# Altium PCB PCB1.PcbDoc
Units mil, origin at the board's own origin, x right, y up, seen from the top; angles counter-clockwise.
Board outline 3430 x 2210 mil, 2 copper layers (Top Layer, Bottom Layer); 43 components, 48 nets, 175 pads, 18 vias.
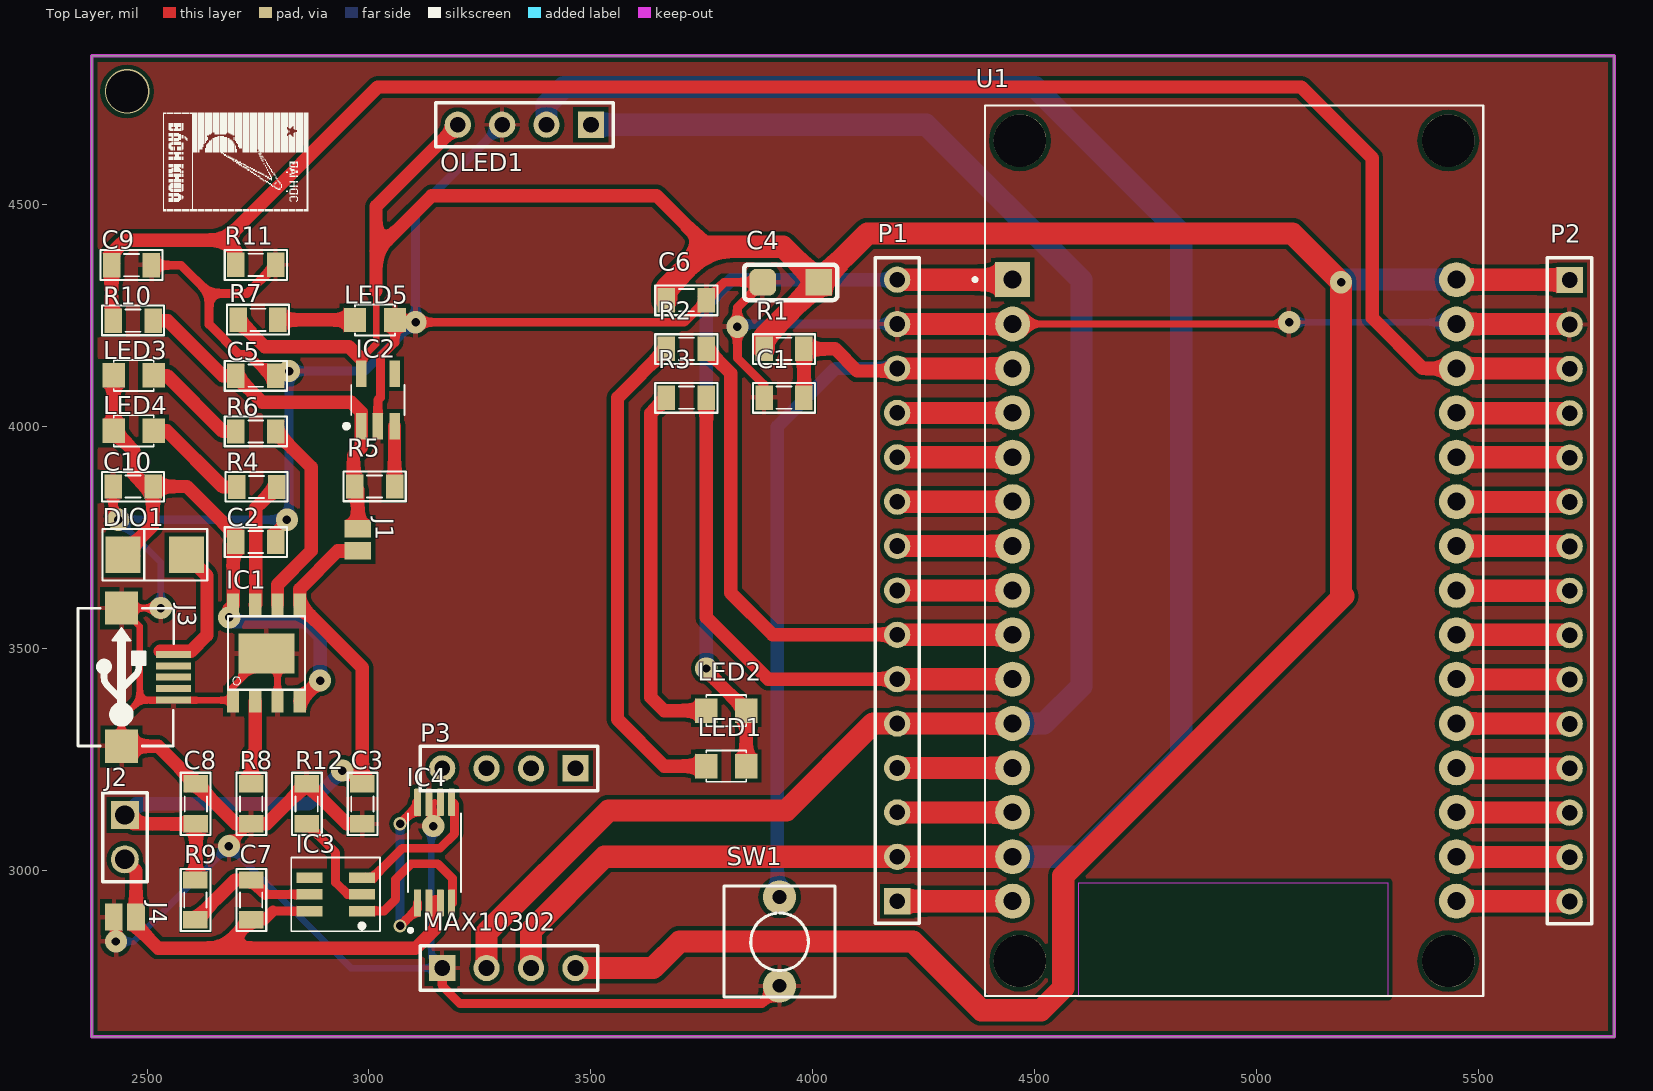
[diagram p0: Top Layer view]
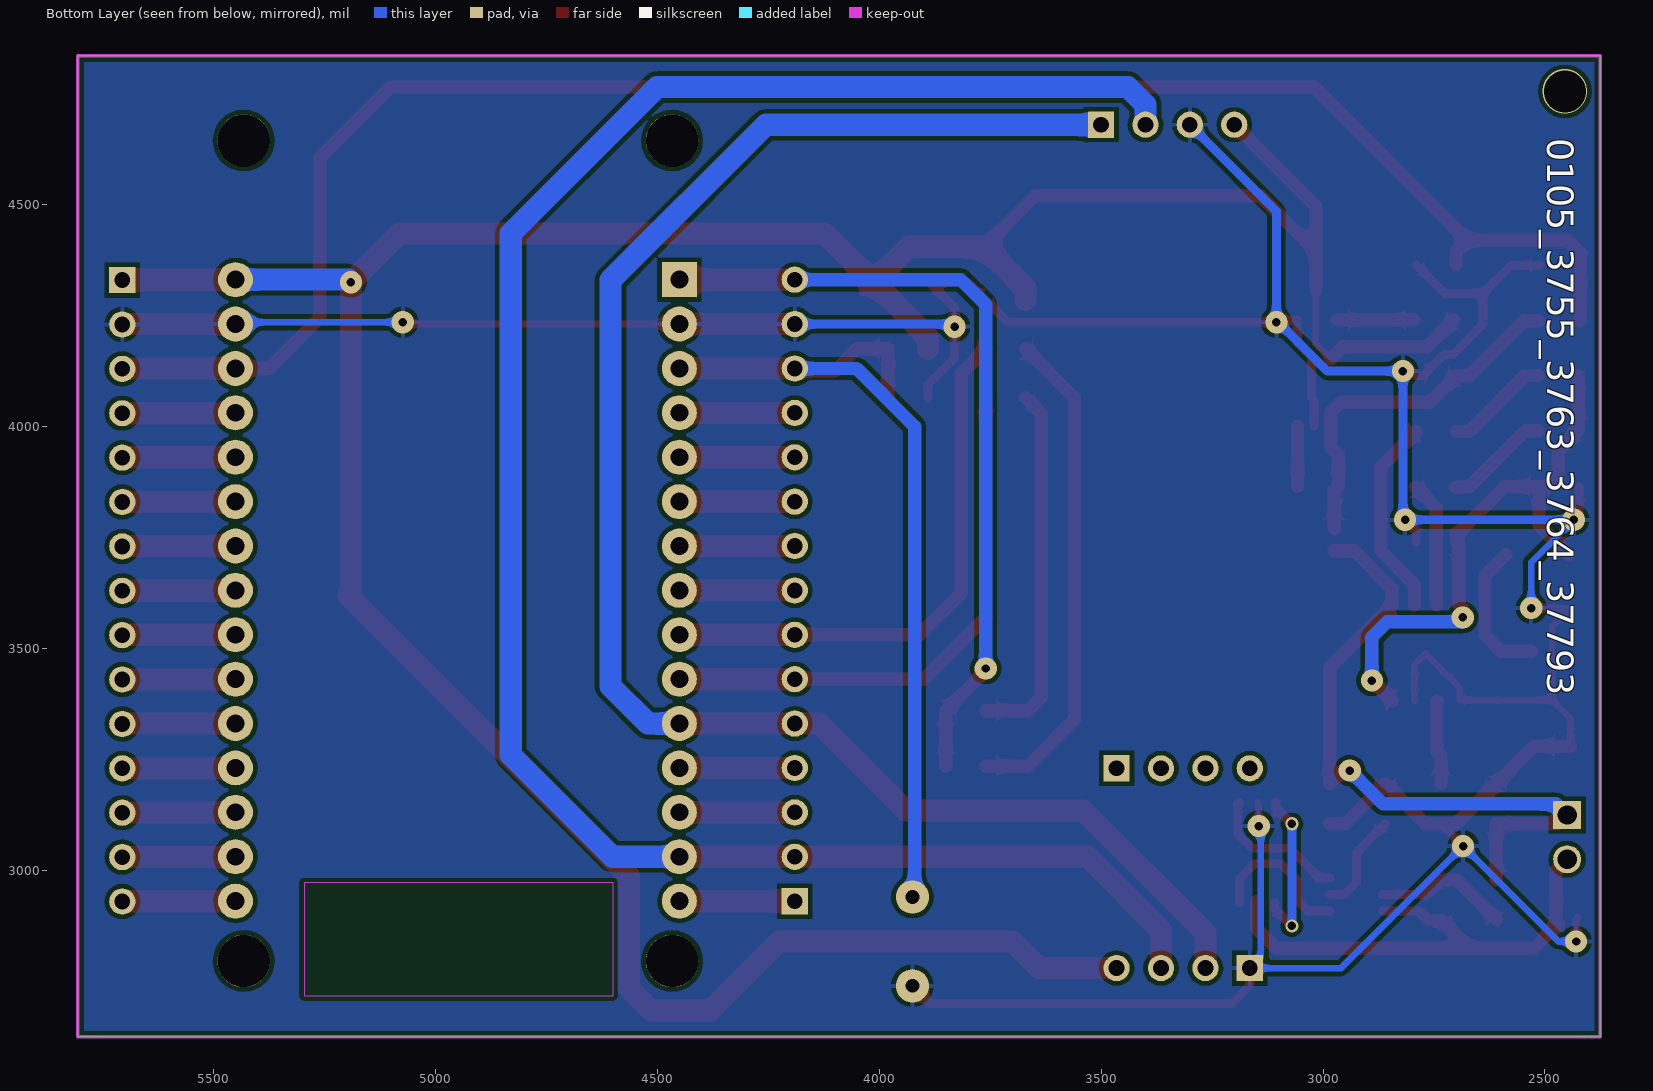
[diagram p1: Bottom Layer view, seen from below]
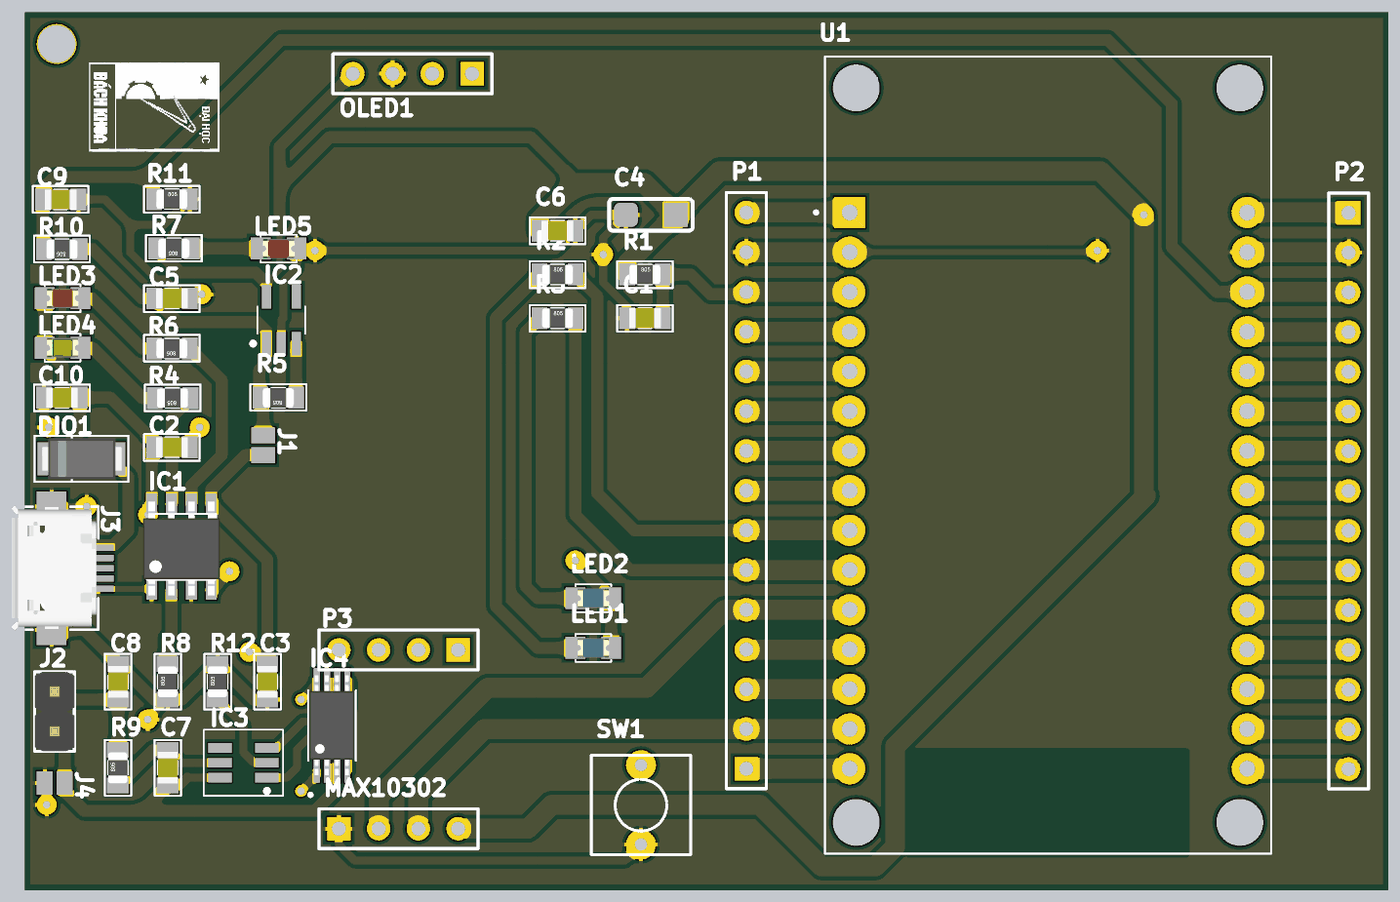
[diagram p2: 3D render of the assembled board from above, using the file's embedded part models]

## Layer stack, top to bottom
Top Solder: solder mask 0.4, Solder Resist, Dk 3.5
Top Layer: signal copper 1.4
Dielectric 1: dielectric 12.6, FR-4, Dk 4.8
Bottom Layer: signal copper 1.4
Bottom Solder: solder mask 0.4, Solder Resist, Dk 3.5

## Board outline
2375,2625 2375,4835 5805,4835 5805,2625

## Design rules (kind name [scope] priority, off if disabled: settings)
Clearance [All] p1: gap=10 ignorepadtopadclearanceinfootprint=FALSE except(0: Arc-Hole Track-Hole SMDPad-Hole THPad-Hole Via-Hole Fill-Hole Poly-Hole Region-Hole Text-Hole)
DiffPairsRouting [All] p1: maxlimit=10 minlimit=10 mostfreqgap=10 toplayer_minwidth=10 toplayer_maxwidth=10 toplayer_prefwidth=10 bottomlayer_minwidth=10 bottomlayer_maxwidth=10 bottomlayer_prefwidth=10 maxuncoupledlength=500
HoleSize [All] p1: absolutevalues=TRUE maxlimit=100 minlimit=15 maxpercent=80.000 minpercent=20.000
PolygonConnect [All] p1: connectstyle=Relief reliefconductorwidth=10 reliefentries=4 polygonreliefangle="90 Angle" airgapwidth=10
RoutingVias [All] p1: holewidth=19 width=50 viastyle="Through Hole" minholewidth=19 minwidth=50 maxholewidth=19 maxwidth=50
SolderMaskExpansion [All] p1: expansion=4
Width [All] p1: maxlimit=50 minlimit=15 preferedwidth=30
28 further rules are at their usual default settings.

## Classes and differential pairs
component class U_Power: C2 C3 C4 C5 C6 C7 C8 C9 C10 C? DIO1 IC1 IC2 IC3 IC4 IC? J1 J2 J3 J4 J? LED3 LED4 LED5 LED? R4 R5 R6 R7 R8 R9 R10 R11 R12 R?
component class U_MCU: C1 LED1 LED2 MAX10302 OLED1 P1 P2 P3 R1 R2 R3 SW1 U1

## Components (designator, comment, footprint, x,y, rotation, side; value= is the part's Value field where it differs from the comment)
C1 "10uF" CAP_0805 3935,4065 r0 top value=33p
C2 "100nF" CAP_0805 2745,3740 r0 top value=33p
C3 "100nF" CAP_0805 2985,3150 r90 top value=33p
C4 "220uF" CAP_TANTALUM_3216 3950,4325 r180 top
C5 "470nF" CAP_0805 2745,4114.7 r0 top value=33p
C6 "100nF" CAP_0805 3715,4285 r0 top value=33p
C7 "100nF" CAP_0805 2734.33,2933.5 r90 top value=33p
C8 "100nF" CAP_0805 2610,3150 r270 top value=33p
C9 "100nF" CAP_0805 2465,4363.5 r180 top value=33p
C10 "10uF" CAP_0805 2468.5,3864.9 r0 top value=33p
DIO1 "Diode SMD" DIO-214AC(SMA) 2514.5,3713 r0 top value=1N5007
IC1 "TP4056" TP4056 2768.96,3490 r90 top
IC2 "RT9013" SOT23-5 3020.21,4060 r90 top
IC3 "DW01A" SOT23-6 2925,2945.94 r180 top
IC4 "FS8205A" FS8205A 3150,3040 r90 top
J1 "Jumper2" JUMPER2 2975,3770 r90 top
J2 "VBAT_IN" JP2-D1T 2449.94,3125 r270 top
J3 "USB-5" USB-M1 2559.29,3435.51 r90 top
J4 "Jumper2" JUMPER2 2425,2895 r180 top
LED1 "LED" LED-0805-Blue 3850,3235 r180 top value="LED 3 ly Single Colour"
LED2 "LED" LED-0805-Blue 3850,3360 r180 top value="LED 3 ly Single Colour"
LED3 "LED" LED-0805-Red 2425,4115.2 r0 top value="LED 3 ly Single Colour"
LED4 "LED" LED-0805-Green 2425,3990.3 r0 top value="LED 3 ly Single Colour"
LED5 "" LED-0805-Red 2968.5,4240 r0 top value="LED 3 ly Single Colour"
MAX10302 "Header 4" HDR1X4 3165,2780 r0 top
OLED1 "LCD" HDR1X4 3500,4680 r180 top
P1 "Header 15" HDR1X15 4190,2930.83 r90 top
P2 "Header 15" HDR1X15 5705,4330 r270 top
P3 "Header 4" HDR1X4 3465,3230 r180 top
R1 "10k" RES-SMD-0805 3935,4175 r0 top
R2 "1k" RES-SMD-0805 3715,4175 r0 top
R3 "1k" RES-SMD-0805 3715,4065 r0 top
R4 "1k" RES-SMD-0805 2746.75,3863.9 r180 top
R5 "10k" RES-SMD-0805 3012.61,3864.9 r180 top
R6 "1k" RES-SMD-0805 2745,3988.8 r180 top
R7 "1k" RES-SMD-0805 2750,4240.5 r180 top
R8 "1k2" RES-SMD-0805 2734.33,3150 r90 top
R9 "0.1k" RES-SMD-0805 2609,2933.5 r90 top
R10 "10k" RES-SMD-0805 2468.5,4238.6 r180 top
R11 "100k" RES-SMD-0805 2745,4364.5 r0 top
R12 "1k" RES-SMD-0805 2859.67,3150 r90 top
SW1 "SW" SW2 3925,2740 r90 top value="SW chip 2 pin"
U1 "ESP32-DEVKIT-V1" MODULE_ESP32_DEVKIT_V1 4950,3720.16 r0 top

## Footprints (in the part's own frame and the unit in brackets; to place one, negate y for a bottom-side part, rotate by r counter-clockwise, add the part's x,y. Pads: shape width x height; smd on the part's side, far side on the other; paste and mask are expansions set on the pad)
CAP_0805 [mil]
  rect 39.37x55 smd: 1(-45,0) 2(45,0)
  silkscreen extent -70,-34 70,33, body extent -40,-25 40,25, height 24
CAP_TANTALUM_3216 [mil]
  rect 60x60 smd: 1(-62.99,0)
  rrect50% 60x60 smd: 2(62.99,0)
  silkscreen extent -105,-40 105,40, body extent -67,-35 67,35, height 67
DIO-214AC(SMA) [mm] "DO-214AC Diode Smallest Size"
  rect 2x2.1 smd: 1(1.88,-0.051) 2(-1.732,-0.051)
  silkscreen extent -2.92,-1.52 3.07,1.42, body extent -2.5,-1.35 2.7,1.25, height 2.4
FS8205A [mm]
  rrect25% 1.56x0.4 smd: 1(-2.88,1.031) 2(-2.88,0.381) 3(-2.88,-0.269) 4(-2.88,-0.919) 5(2.88,-0.919) 6(2.88,-0.269) 7(2.88,0.381) 8(2.88,1.031)
  silkscreen extent -4.54,-1.46 2.25,1.57, body extent -3.2,-1.4 3.2,1.53, height 1.2
HDR1X4 [mm] "Connector; Header; 4 Position"
  rect 1.5x1.5 hole 0.9: 1(0,0)
  round 1.5 hole 0.9: 2(2.54,0) 3(5.08,0) 4(7.62,0)
  silkscreen extent -1.27,-1.27 8.89,1.27, body extent -1.27,-1.27 8.89,1.27, height 7
HDR1X15 [mm] "Connector; Header; 15 Position"
  rect 1.5x1.5 hole 0.9: 1(0,0)
  round 1.5 hole 0.9: 2(2.54,0) 3(5.08,0) 4(7.62,0) 5(10.16,0) 6(12.7,0) 7(15.24,0) 8(17.78,0) 9(20.32,0) 10(22.86,0) 11(25.4,0) 12(27.94,0) 13(30.48,0) 14(33.02,0) 15(35.56,0)
  silkscreen extent -1.27,-1.27 36.83,1.27, body extent -1.27,-1.27 36.83,1.27, height 7
JP2-D1T [mm] "2 pins, 1 row, straight, gold plating"
  rect 1.6x1.6 hole 1.1: 1(0,0)
  round 1.6 hole 1.1: 2(2.54,0)
  silkscreen extent -1.27,-1.27 3.81,1.27, body extent -1.27,-1.27 3.81,1.27, height 8.54
JUMPER2 [mil]
  rect 40x60 smd: 1(-50,0) 2(0,0)
LED-0805-Blue [mil]
  rect 50x55 smd: 1(0,0) 2(90,0)
  silkscreen extent 0,-35 90,35, body extent 5,-25 85,25, height 43
LED-0805-Green [mil]
  rect 50x55 smd: 1(0,0) 2(90,0)
  silkscreen extent 0,-35 90,35, body extent 5,-25 85,25, height 43
LED-0805-Red [mil]
  rect 50x55 smd: 1(0,0) 2(90,0)
  silkscreen extent 0,-35 90,35, body extent 5,-25 85,25, height 43
MODULE_ESP32_DEVKIT_V1 [mm]
  rect 2x2 / inner round 2 / far side rect 2x2 hole 1.02: 1(-12.7,15.515)
  round 2 hole 1.02: 2(-12.7,12.975) 3(-12.7,10.435) 4(-12.7,7.895) 5(-12.7,5.355) 6(-12.7,2.815) 7(-12.7,0.275) 8(-12.7,-2.265) 9(-12.7,-4.805) 10(-12.7,-7.345) 11(-12.7,-9.885) 12(-12.7,-12.425) 13(-12.7,-14.965) 14(-12.7,-17.505) 15(-12.7,-20.045) 16(12.7,-20.045) 17(12.7,-17.505) 18(12.7,-14.965) 19(12.7,-12.425) 20(12.7,-9.885) 21(12.7,-7.345) 22(12.7,-4.805) 23(12.7,-2.265) 24(12.7,0.275) 25(12.7,2.815) 26(12.7,5.355) 27(12.7,7.895) 28(12.7,10.435) 29(12.7,12.975) 30(12.7,15.515)
  round 3 hole 3 unplated: ""(-12.28,-23.475) ""(-12.28,23.475) ""(12.23,-23.475) ""(12.23,23.475)
  Keep-Out Layer region: 8.78,-25.475 -8.91,-25.475 -8.91,-18.985 8.78,-18.985
  Keep-Out Layer region: 8.78,-25.475 -8.91,-25.475 -8.91,-18.985 8.78,-18.985
  silkscreen extent -14.95,-25.48 14.23,25.48
RES-SMD-0805 [mil]
  rect 39.37x55 smd: 1(-45,0) 2(45,0)
  silkscreen extent -70,-34 70,33, body extent -39,-25 39,25, height 31
SOT23-5 [mm] "SOT23, 5-Leads, Body 3.0x3.0mm (max), Pitch 0.95mm, IPC Medium Density"
  rect 1.5x0.6 smd: 1(-1.5,0.95) 2(-1.5,0) 3(-1.5,-0.95) 4(1.5,-0.95) 5(1.5,0.95)
  silkscreen extent -1.62,-1.52 0.87,1.92, body extent -1.75,-1.52 1.75,1.53, height 1.45
SOT23-6 [mm] "SOT23, 5-Leads, Body 3.0x3.0mm (max), Pitch 0.95mm, IPC Medium Density"
  rect 1.5x0.6 smd: 1(-1.5,0.95) 2(-1.5,0) 3(-1.5,-0.95) 4(1.5,-0.95) 5(1.5,0) 6(1.5,0.95)
  silkscreen extent -2.54,-2.11 2.54,2.11, body extent -1.75,-1.52 1.75,1.53, height 1.45
SW2 [mil] "SW button 2pin, 250x 250 mil"
  round 75 hole 31: 1(0,0) 2(200,0)
  silkscreen extent -25,-125 225,125
TP4056 [mm]
  rect 1.3x0.7 smd: 1(-2.75,1.905) 2(-2.75,0.635) 3(-2.75,-0.635) 4(-2.75,-1.905) 5(2.75,-1.905) 6(2.75,-0.635) 7(2.75,0.635) 8(2.75,1.905)
  rect 2.3x3.2 smd: 3(-0.025,0)
  silkscreen extent -2.1,-2.2 2.1,2.2, body extent -3.13,-2.45 2.87,2.45, height 1.75
USB-M1 [mm]
  rect 0.4x2 smd: 1(1.3,0) 2(0.65,0) 3(0,0) 4(-0.65,0) 5(-1.321,0)
  rect 1.9x1.9 smd: 5(-3.95,2.968) 5(3.95,2.968)
  silkscreen extent -3.94,-0.03 3.94,5.46, body extent -3.98,0.11 4,5.54, height 2.71

## Part data
C1 C2 C3 C5 C6 C7 C8 C9 C10: library part CapSMD, "Capacitor", LatestRevisionDate=17-Jul-2002, LatestRevisionNote="Re-released for DXP Platform.", PackageReference=RAD-0.3, Published=8-Jun-2000, Publisher="Altium Limited"
C4: library part "Cap Pol", "Polarized Capacitor (Axial)", LatestRevisionDate=17-Jul-2002, LatestRevisionNote="Re-released for DXP Platform.", PackageReference=POLAR0.8, Published=8-Jun-2000, Publisher="Altium Limited"
DIO1: "Default Diode", Code - JEDEC=DO-214-AB, Published=8-Jun-2000, Publisher="Altium Limited", Revision="July-2002: Re-released for DXP Platform."
IC1: "Complete single cell Li-Ion battery with a constant current / constant voltage linear charger"
IC2: "https://linhkien.cxt.vn/5435-rt9013-33gb-ic-reg-linear-33v-500ma-sot23-5.html"
IC3: "One Cell Lithium-ion/Polymer Battery Protection IC"
J1 J4: "Jumper, 2-Pin"
J2: library part JP2, "WR-PHD 2.54 mm Angled Socket Header", Manufacturer="Würth Elektronik eiSos GmbH", partNo=613002143121, ComponentLink1 Description=Manufacturer, ComponentLink1URL=http://www.we-online.com, ComponentLink2 Description=Datasheet, ComponentLink2URL=http://katalog.we-online.de/em/datasheet/6130xx143121.pdf, Created by="Karrer Zheng", Created Date="29 March 2013", NoPins=02
J3: Manufacturer=FCI, Manufacturer Part Number=10118193-0001LF, Supplier Part Number 1=609-4616-1-ND, .Checked PCB=RF, .Checked SCH=MM, .Creator=MM, Category="Connectors, Interconnects", ComponentLink1Description=http://portal.fciconnect.com/Comergent//fci/drawing/10118193.pdf, ComponentLink1URL=http://portal.fciconnect.com/Comergent//fci/drawing/10118193.pdf, Connector Type="USB - micro B", Features="Shielded, Solder Retention", Gender=Receptacle, Ingress Protection=-, Mounting Type="Surface Mount, Right Angle, Horizontal", Number of Contacts=5, Packaging="Cut Tape (CT)", Pricing 1="1=0.46, 10=0.433, 25=0.3712, 50=0.3156, 100=0.3032, 250=0.27224, 500=0.25988 (USD)", RoHS="RoHS Compliant", Specifications="USB 2.0", Stock 1=28642, Supplier 1=Digi-Key
LED1 LED2 LED3 LED4: "LED Single colour Green and Red"
LED5: library part LED, "LED Single colour Green and Red"
MAX10302 P3: "Header, 4-Pin", LatestRevisionDate=17-Jul-2002, LatestRevisionNote="Re-released for DXP Platform.", Publisher="Altium Limited"
OLED1: library part "Header 4", "Header, 4-Pin", LatestRevisionDate=17-Jul-2002, LatestRevisionNote="Re-released for DXP Platform.", Publisher="Altium Limited"
P1 P2: "Header, 15-Pin", LatestRevisionDate=17-Jul-2002, LatestRevisionNote="Re-released for DXP Platform.", Publisher="Altium Limited"
R1 R2 R3 R7 R9 R12: library part "Resistor - SMD", "Resistor SMD", Manufacturer="Generic Components", Class=Passive, Published=08/06/2000, Publisher="Altium Hobart Technology Centre"
R4 R5 R6 R8 R10 R11: library part "Resistor - SMD", "Resistor", Manufacturer="Generic Components", Class=Passive, Published=08/06/2000, Publisher="Altium Hobart Technology Centre"
SW1: library part SW2, "Switch button 2 pin"
U1: "Dual core, Wi-Fi: 2.4 GHz up to 150 Mbits/s,BLE (Bluetooth Low Energy) and legacy Bluetooth, 32 bits, Up to 240 MHz", Package=None, Availability="Not in stock", Check_prices=https://www.snapeda.com/parts/ESP32-DEVKIT-V1/Do+it/view-part/?ref=eda, MF="Do it", MP=ESP32-DEVKIT-V1, Price=None, SnapEDA_Link=https://www.snapeda.com/parts/ESP32-DEVKIT-V1/Do+it/view-part/?ref=snap

## Via types
v1: diameter 50, hole 19, Top Layer to Bottom Layer, 15 vias
v2: diameter 30, hole 19, Top Layer to Bottom Layer, 2 vias
v3: diameter 100, hole 95, Top Layer to Bottom Layer, 1 vias

## Nets (pads, with @x,y where several pads share a name; then routed paths per layer and width w, separated by ;. In a path a pad name is that pad's centre, name@x,y a point inside that pad or via, vN(x,y) a via of type N, cw(c..) or ccw(c..) an arc to the next point about the centre after c; other vN are vias at no path point)
3.3_MCU: LED1.1 LED2.1 P1.15 U1.1 | length 1790.4
  Top Layer w30: v1(3760,3455) 3760,3450 LED2.1 LED1.1
  Top Layer w50: P1.15 U1.1@4450,4330.83
  Bottom Layer w30: v1(3760,3455) 3760,4275 3815.83,4330.83 P1.15
5V: C2.1 C10.2 DIO1.2 IC1.4 IC1.8 LED3.1 LED4.1 | length 1293.1
  Top Layer w30: LED3.1 LED4.1 2470,3945.3 2470,3892.4 2497.5,3864.9 C10.2 ; DIO1.2 2513.5,3778.2 C10.2 ; v1(2685,3570) 2685,3589.31 IC1.8 2693.96,3733.96 C2.1 2700,3755 2590.1,3864.9 C10.2 ; IC1.4 v1(2890,3427.78)
  Bottom Layer w30: v1(2685,3570) 2685,3560 2855,3560 2890,3525 v1(2890,3427.78)
D2__MCU: P1.12 U1.4 | length 260
  Top Layer w50: P1.12 U1.4@4450,4030.83
D4_MCU: P1.11 U1.5 | length 260
  Top Layer w50: P1.11 U1.5@4450,3930.83
D5_MCU: P1.8 U1.8 | length 260
  Top Layer w50: P1.8 U1.8@4450,3630.83
D12_MCU: P2.4 U1.27 | length 255.3
  Top Layer w50: U1.27@5450,4030.83 5450.83,4030 P2.4
D13_MCU: C9.2 P2.3 R10.2 R11.1 U1.28 | length 4132.9
  Top Layer w30: R10.2 2420,4242.1 C9.2 2420,4390 2450,4420 2675,4420 ; R11.1 2700,4395 2675,4420 ; U1.28@5450,4130.83 5374.17,4130.83 5260,4245 5260,4605 5100,4765 3020,4765 2675,4420
  Top Layer w50: U1.28@5450,4130.83 5704.17,4130.83 P2.3
D14_MCU: P2.5 U1.26 | length 255.3
  Top Layer w50: U1.26@5450,3930.83 5704.17,3930.83 P2.5
D15_MCU: C1.2 P1.13 R1.2 SW1.2 U1.3 | length 2002.3
  Top Layer w30: C1.2 R1.2 4050,4175 4100,4125 4184.17,4125 P1.13
  Top Layer w50: P1.13 U1.3@4450,4130.83
  Bottom Layer w30: SW1.2@3920,2925 3920,4000 4050.83,4130.83 P1.13
D18_MCU: P1.7 R2.2 U1.9 | length 1246.8
  Top Layer w30: R2.2 3815,4120 3815,3625 3909.17,3530.83 P1.7
  Top Layer w50: P1.7 U1.9@4450,3530.83
D19_MCU: P1.6 R3.2 U1.10 | length 1242.6
  Top Layer w30: R3.2 3760,3570 3899.17,3430.83 P1.6
  Top Layer w50: P1.6 U1.10@4450,3430.83
D21_MCU: MAX10302.2 OLED1.1 P1.5 U1.11 | length 3814.9
  Top Layer w50: MAX10302.2 3265,2860 3540,3135 3940,3135 4135.83,3330.83 P1.5 4449.84,3330.83 U1.11
  Bottom Layer w50: OLED1.1 4255,4680 4605,4330 4605,3415 4520.83,3330.83 U1.11@4450,3330.83
D22_MCU: MAX10302.3 OLED1.2 P1.2 U1.14 | length 4516.9
  Top Layer w50: MAX10302.3 3365,2865 3530.83,3030.83 P1.2 4190.16,3030.98 U1.14
  Bottom Layer w50: OLED1.2 3400,4725 3440,4765 4500,4765 4830,4435 4830,3260 4600.83,3030.83 U1.14@4450,3030.83
D23_MCU: P1.1 U1.15 | length 260
  Top Layer w50: P1.1 U1.15@4450,2930.83
D25_MCU: P2.8 U1.23 | length 255.3
  Top Layer w50: U1.23@5450,3630.83 5450.83,3630 P2.8
D26_MCU: P2.7 U1.24 | length 255.3
  Top Layer w50: U1.24@5450,3730.83 5704.17,3730.83 P2.7
D27_MCU: P2.6 U1.25 | length 262.4
  Top Layer w50: U1.25@5450,3830.83 5450.83,3830 P2.6 P2.6@5700,3835
D32_MCU: P2.10 U1.21 | length 255.3
  Top Layer w50: U1.21@5450,3430.83 5450.83,3430 P2.10
D33_MCU: P2.9 U1.22 | length 255.3
  Top Layer w50: U1.22@5450,3530.83 5704.17,3530.83 P2.9
D34_MCU: P2.12 U1.19 | length 255.3
  Top Layer w50: U1.19@5450,3230.83 5450.83,3230 P2.12
D35_MCU: P2.11 U1.20 | length 255.3
  Top Layer w50: U1.20@5450,3330.83 5704.17,3330.83 P2.11
EN: P2.15 U1.16 | length 255.3
  Top Layer w50: U1.16@5450,2930.83 5704.17,2930.83 P2.15
GND: C1.1 C2.2 C3.1 C4.2 C5.2 C6.2 C8.1 C9.1 C10.1 IC1.1 IC1.3 IC2.2 IC4.6 IC4.7 J3.5 J4.2 LED5.2 MAX10302.1 OLED1.3 P1.14 P2.2 R8.1 R11.2 R12.2 SW1.1 U1.2 U1.29 | length 9752.2
  Top Layer w15: J4.2 2430,2890 v1(2430,2840) ; J3.5@2442.45,3280 2442.45,3342.45 2483.51,3383.51 ; v1(2531.02,3591.02) 2442.45,3591.02 2483.51,3549.96 2483.51,3383.51 ; v1(2684.33,3055) R8.1 ; IC1.3@2793.96,3381.73 2793.96,3464 2768.96,3489 2692.18,3412.22 2692.18,3383.51 2559.29,3383.51 2483.51,3383.51 ; v1(3145,3100) 3145,3150.59 3147.8,3153.39 ; U1.2 5069.02,4230.98 v1(5073.03,4235)
  Top Layer w20: C10.1 2423.5,3801.5 v1(2435,3790) ; C9.1 2576.5,4363.5 2640,4300 ; C2.2 2790,3765 v1(2815,3790) ; R11.2 2725.5,4300 2640,4300 ; v1(2820,4125) 2800.3,4125 C5.2 2775.47,4114.7 2727.97,4162.2 2707.83,4162.2 2640,4230.03 2640,4300 ; IC2.2 3020.21,4060.21 3025.8,4065.8 3025.8,4156.87 3058.5,4189.57 LED5.2 3100,4240 v1(3105,4235) 3710,4235 C6.2 3800,4325 C4.2 3830,4267.99 v1(3830,4225) 3830,4154.5 3890,4094.5 C1.1 ; MAX10302.1@3165,2760 3165,2740 3205,2700 3885,2700 SW1.1
  Top Layer w30: J3.5@2442.45,3280 2525,3280 C8.1 2700,3105 R8.1 2769.67,3105 R12.2 2949.67,3105 C3.1
  Top Layer w50: P1.14 U1.2@4450,4230.83 ; U1.29@5450,4230.83 5704.17,4230.83 P2.2
  Bottom Layer w15: v1(2430,2840) 2469.33,2840 v1(2684.33,3055) 2959.33,2780 MAX10302.1 3140,2805 3140,3095 v1(3145,3100) ; v1(2435,3790) 2531.02,3693.98 v1(2531.02,3591.02) ; v1(5073.03,4235) 5445.98,4235 U1.29
  Bottom Layer w20: v1(2435,3790) v1(2815,3790) 2820,3795 v1(2820,4125) 2990.6,4125 3100.6,4235 v1(3105,4235) 3105,4485 OLED1.3 ; v1(3830,4225) 3835.83,4230.83 P1.14
NetC7_1: C7.1 IC3.6 IC4.2 IC4.3 J2.2 J4.1 | length 1151.5
  Top Layer w20: 2783.54,2908.54 IC3.6
  Top Layer w25: C7.1 2763.5,2888.5 2783.54,2908.54
  Top Layer w30: J2.2 2475,2999.94 J4.1 ; J4.1@2470,2880 2525,2825 2670.83,2825 ; C7.1 2670.83,2825 ; 3150,2930 3150,2870 3105,2825 2670.83,2825
NetC7_2: C7.2 IC3.5 R9.1 | length 307.7
  Top Layer w20: 2766.89,2945.94 IC3.5
  Top Layer w25: C7.2 2766.89,2945.94
  Top Layer w30: R9.1 2699,2978.5 C7.2
NetDIO1_1: DIO1.1 J3.1 | length 320.2
  Top Layer w30: J3.1@2530,3493.98 2598.98,3493.98 2635,3530 2635,3664.5 DIO1.1
NetIC1_2: IC1.2 R8.2 | length 190.7
  Top Layer w30: R8.2 2734.33,3259.33 2743.96,3268.96 IC1.2
NetIC1_6: IC1.6 R6.1 | length 455.2
  Top Layer w30: R6.1 2870,3908.8 2870,3720 2793.96,3643.96 IC1.6
NetIC1_7: IC1.7 R4.1 | length 285.4
  Top Layer w30: IC1.7 2745,3599.31 2745,3817.15 R4.1
NetIC2_3: IC2.3 R5.1 | length 136
  Top Layer w30: R5.1 IC2.3
NetIC3_1: IC3.1 IC4.4 | length 343.6
  Top Layer w20: IC3.1 3033.54,2908.54 3060,2935 3060,2980 3095,3015 3155,3015 3188.46,2981.54 IC4.4@3188.46,2926.61
NetIC3_2: IC3.2 R12.1 | length 229.5
  Top Layer w20: R12.1 2925,3039.66 2925,2972.78 2951.83,2945.94 IC3.2
NetIC3_3: IC3.3 IC4.5 | length 322.3
  Top Layer w20: IC3.3 3008.35,2983.35 3075,3050 3160,3050 3192.8,3082.8 3192.8,3149.06 IC4.5@3188.46,3153.39
NetIC4_1: IC4.1 IC4.8 | length 361.7
  Top Layer w20: v2(3070,2875) 3109.41,2914.41 IC4.1 ; v2(3070,3105) 3107.13,3142.13 IC4.8@3107.13,3153.39
  Bottom Layer w20: v2(3070,2875) v2(3070,3105)
NetLED1_2: LED1.2 R2.1 | length 1124.1
  Top Layer w30: R2.1 3560,4065 3560,3340 3665,3235 LED1.2
NetLED2_2: LED2.2 R3.1 | length 826.9
  Top Layer w30: R3.1 3635,4030 3635,3390 3665,3360 LED2.2
NetLED3_2: LED3.2 R6.2 | length 237.3
  Top Layer w30: LED3.2@2515,4115 2545,4115 2671.2,3988.8 R6.2
NetLED4_2: LED4.2 R4.2 | length 239.1
  Top Layer w30: LED4.2 2544.7,3990.3 2671.1,3863.9 R4.2
NetLED5_1: LED5.1 R7.1 | length 173.7
  Top Layer w30: R7.1 2968,4240.5 LED5.1
RX0_MCU: P1.4 U1.12 | length 260
  Top Layer w50: P1.4 U1.12@4450,3230.83
RX2_MCU: P1.10 U1.6 | length 260
  Top Layer w50: P1.10 U1.6@4450,3830.83
TX0_MCU: P1.3 U1.13 | length 260
  Top Layer w50: P1.3 U1.13@4450,3130.83
TX2_MCU: P1.9 U1.7 | length 260
  Top Layer w50: P1.9 U1.7@4450,3730.83
VBAT: C3.2 C8.2 IC1.5 J1.1 J2.1 R9.2 | length 1548.2
  Top Layer w30: J2.1 2469.94,3105 C8.2 2610,2979.5 R9.2 ; v1(2940,3225) 2955,3225 C3.2 2985,3457.22 IC1.5 2843.96,3633.96 2930,3720 J1.1
  Bottom Layer w30: J2.1 2474.94,3150 2865,3150 v1(2940,3225)
VCCB: C5.1 IC2.1 J1.2 R5.2 R10.1 | length 827.3
  Top Layer w30: R10.1 2546.4,4238.6 2670.3,4114.7 C5.1 2759.7,4055 2960,4055 2982.81,4032.19 IC2.1 2982.81,3952.81 2965,3935 R5.2@2965,3865 ; R5.2 2975,3857.51 J1.2
VIN_MCU: C4.1 C6.1 IC2.5 MAX10302.4 OLED1.4 P2.1 R1.1 R7.2 U1.30 | length 7269.4
  Top Layer w15: 2982.81,4152.19 2998.3,4167.68 2998.3,4168.26 3016,4185.96 3016,4306
  Top Layer w30: R7.2 2765.5,4180 2955,4180 2982.81,4152.19 ; 3016,4306 3016,4395 ; OLED1.4 3016,4496 3016,4395 ; 3762.81,4405 3647.81,4520 3141,4520 3016,4395
  Top Layer w50: MAX10302.4 3640,2780 3700,2840 4225,2840 4380,2685 4514.21,2685 4564.21,2735 4564.21,2987.21 5195,3618 5190,3623 v1(5190,4325) 5080,4435 4122.99,4435 C4.1 ; C6.1 3670,4312.19 3762.81,4405 3932.99,4405 C4.1 ; R1.1 3890,4202.01 C4.1 ; U1.30@5450,4330.83 5704.17,4330.83 P2.1
  Bottom Layer w50: v1(5190,4325) 5195.98,4330.98 U1.30
VN: P2.13 U1.18 | length 255.3
  Top Layer w50: U1.18@5450,3130.83 5704.17,3130.83 P2.13
VP: P2.14 U1.17 | length 255.3
  Top Layer w50: U1.17@5450,3030.83 5450.83,3030 P2.14
pads on no net: IC2.4 IC3.4 J3.2 J3.3 J3.4 P3.1 P3.2 P3.3 P3.4 U1.
copper on no net:
  other v3: 2455,4755

## Polygon pours and split planes (outlines as drawn)
GND on Bottom Layer "leehie" (solid, remove dead copper, pour order 15): 2375,2625 5805,2625 5805,4835 2375,4835
no net on Bottom Layer "leehie" (solid, remove dead copper, pour order 2): 2405,4850
GND on Top Layer "leehie" (solid, remove dead copper, pour order 17): 2375,4835 2375,2625 5805,2625 5805,4835

## Keep-outs
Keep-Out Layer:
  lines w7.87: 2375,2625 5805,2625 5805,4835 5785,4835 2375,4835 2375,2625

## Silkscreen, mask and mechanical layers (free items; w line width, h text height)
Top Overlay:
  drawing of 697 lines, arcs and shapes, not listed
Bottom Overlay:
  text "0105_3755_3763_3764_37793" at 2495,4650 h60 r90